# EAGLE board lupa-breakout (EAGLE 8.3.1)
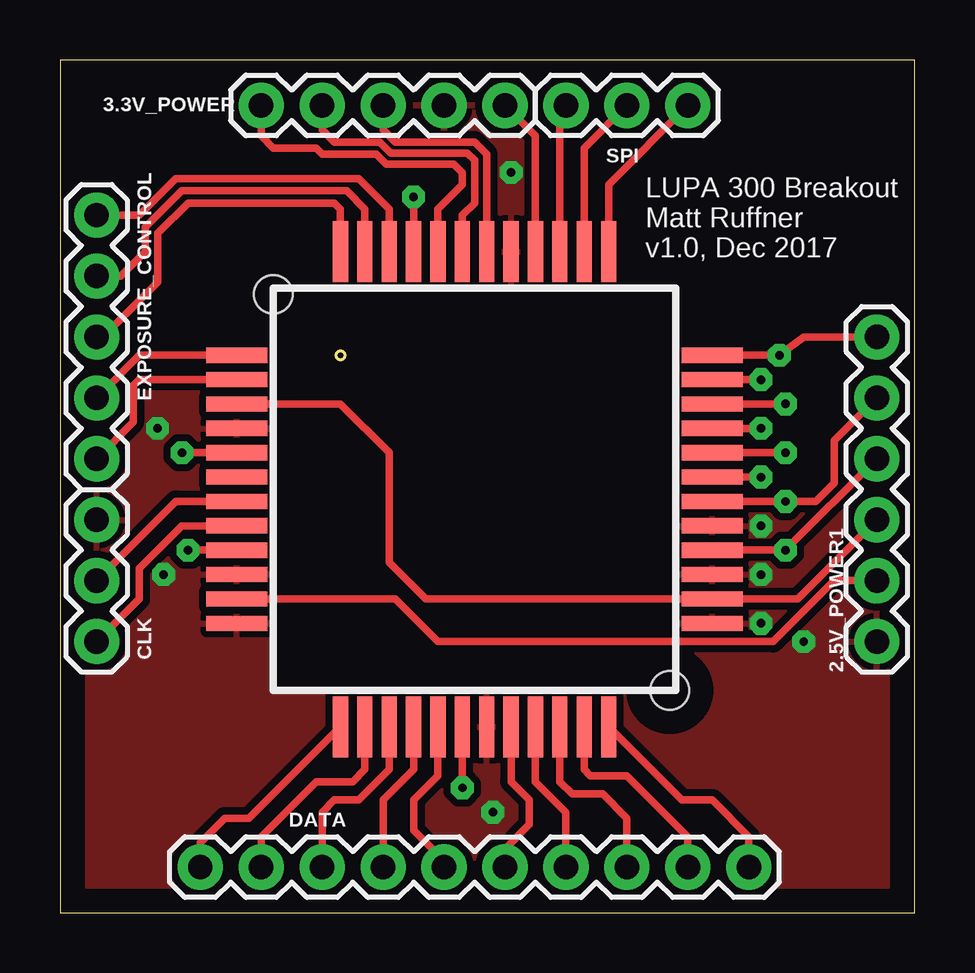
[diagram p0: board, top side]
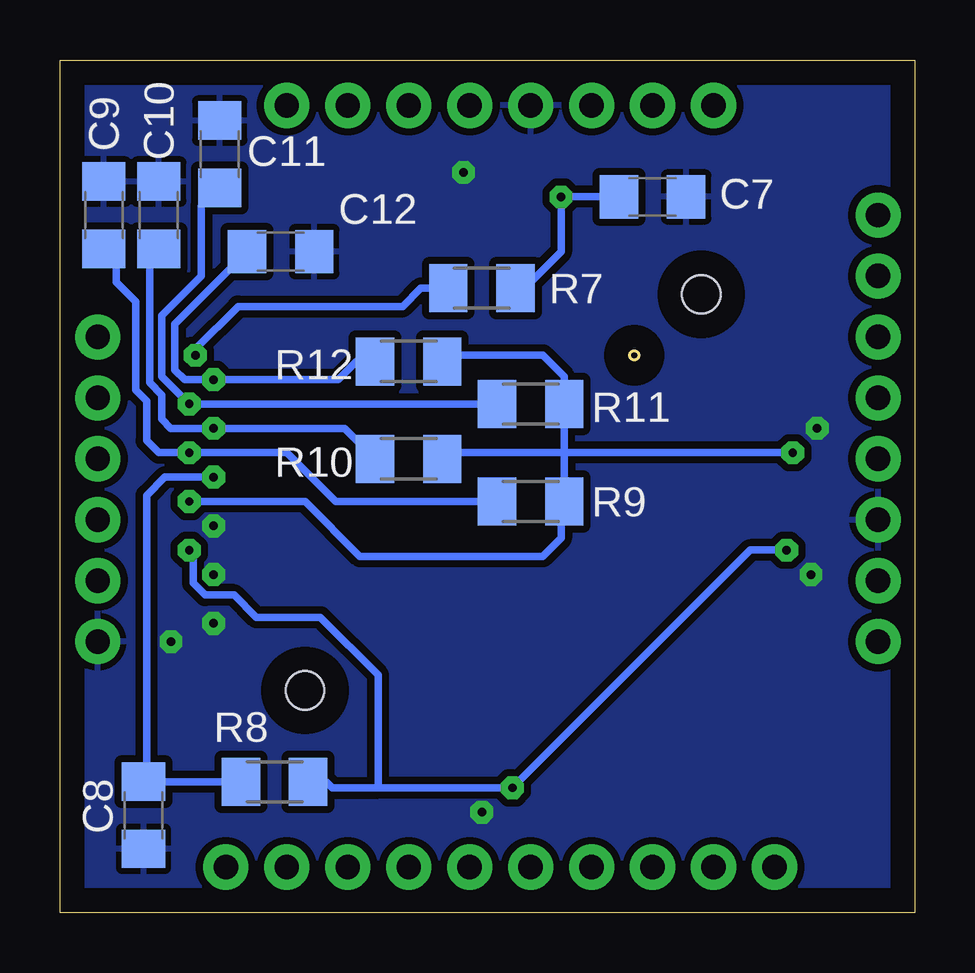
[diagram p1: board, bottom side, seen from below]

Size 35.61 x 35.55 mm. Coordinates in mm from the lower left corner, seen from the top.
Outline: 0,0 35.61,0 35.61,35.55 0,35.55 0,0
Copper layers (1*16): Top 0.035mm / dielectric 1.5mm / Bottom 0.035mm
Design rules "default": minimum track width 6mil, minimum drill 0.35mm, track to track 6mil, track to pad 6mil, pad to pad 6mil, via to via 6mil, smd to smd 6mil, copper to edge 40mil, drill to drill 6mil, minimum pad ring 10mil, minimum via ring 8mil, stop-mask expansion 4mil, vias tented up to drill 0mil, thermal gap 10mil

## Footprints (pad centres in the part's own frame; a part is rotated, then mirrored left to right if it is on the bottom)
1X06 = drill 1.016 pad 1.88: 1 0,0; 2 2.54,0; 3 5.08,0; 4 7.62,0; 5 10.16,0; 6 12.7,0
1X05 = drill 1.016 pad 1.88: 1 0,0; 2 2.54,0; 3 5.08,0; 4 7.62,0; 5 10.16,0
C1206 = smd 1.6 x 1.8: 1 -1.4,0; 2 1.4,0
1X03 = drill 1.016 pad 1.88: 1 0,0; 2 2.54,0; 3 5.08,0
1X10 = drill 1.016 pad 1.88: 1 0,0; 2 2.54,0; 3 5.08,0; 4 7.62,0; 5 10.16,0; 6 12.7,0; 7 15.24,0; 8 17.78,0; 9 20.32,0; 10 22.86,0
M1206 = smd 1.6 x 2: 1 -1.4,0; 2 1.4,0
LUPA300 = smd 2.54 x 0.635: P$1 -2.794,1.524; P$2 -2.794,2.54; P$3 -2.794,3.556; P$4 -2.794,4.572; P$5 -2.794,5.588; P$6 -2.794,6.604; P$7 -2.794,7.62; P$8 -2.794,8.636; P$9 -2.794,9.652; P$10 -2.794,10.668; P$11 -2.794,11.684; P$12 -2.794,12.7; P$13 17.018,12.7; P$14 17.018,11.684; P$15 17.018,10.668; P$16 17.018,9.652; P$17 17.018,8.636; P$18 17.018,7.62; P$19 17.018,6.604; P$20 17.018,5.588; P$21 17.018,4.572; P$22 17.018,3.556; P$23 17.018,2.54; P$24 17.018,1.524 | smd 0.635 x 2.54: P$25 1.524,-2.794; P$26 2.54,-2.794; P$27 3.556,-2.794; P$28 4.572,-2.794; P$29 5.588,-2.794; P$30 6.604,-2.794; P$31 7.62,-2.794; P$32 8.636,-2.794; P$33 9.652,-2.794; P$34 10.668,-2.794; P$35 11.684,-2.794; P$36 12.7,-2.794; P$37 1.524,17.018; P$38 2.54,17.018; P$39 3.556,17.018; P$40 4.572,17.018; P$41 5.588,17.018; P$42 6.604,17.018; P$43 7.62,17.018; P$44 8.636,17.018; P$45 9.652,17.018; P$46 10.668,17.018; P$47 11.684,17.018; P$48 12.7,17.018 | hole 1.6: -1.27,15.24; 15.24,-1.27

## Placement (x,y rotation side)
2.5V_POWER1  [1X06]  34.04,11.3 90 top
3.3V_POWER  [1X05]  8.38,33.66 0 top
C7  0.1uF  [C1206]  10.92,29.84 0 bottom
C8  0.1uF  [C1206]  32.13,4.06 270 bottom
C9  .1uF  [C1206]  33.78,29.08 90 bottom
C10  0.1uF  [C1206]  31.5,29.08 90 bottom
C11  0.1uF  [C1206]  28.96,31.62 90 bottom
C12  0.1uF  [C1206]  26.42,27.56 0 bottom
CLK  455-1750-1-ND  [1X03]  1.52,11.3 90 top
DATA  [1X10]  28.7,1.91 180 top
EXPOSURE_CONTROL  [1X05]  1.52,18.92 90 top
R7  68k  [M1206]  18.03,26.04 0 bottom
R8  10k  [M1206]  26.67,5.46 180 bottom
R9  110k  [M1206]  16,17.14 180 bottom
R10  42k  [M1206]  21.08,18.92 180 bottom
R11  1.5M  [M1206]  16,21.21 180 bottom
R12  500k  [M1206]  21.08,22.99 180 bottom
SPI  455-1750-1-ND  [1X03]  26.16,33.66 180 top
U$1  [LUPA300]  10.16,10.54 0 top

## Library data of the parts
2.5V_POWER1 = SparkFun-Connectors; PROD_ID: CONN-08437
3.3V_POWER EXPOSURE_CONTROL = SparkFun-Connectors
C7-C12 = rcl
CLK SPI = SparkFun-Connectors; PROD_ID: XXX-00000
DATA = SparkFun-Connectors; PROD_ID: CONN-11563
R7-R12 = resistor
U$1 = andon

## Nets
ADC_BIAS: C8.1 R8.2 U$1.P$18
BIAS1: C12.1 R12.2 U$1.P$14
BIAS2: C11.1 R11.2 U$1.P$15
BIAS3: C10.1 R10.2 U$1.P$16
BIAS4: C9.1 R9.2 U$1.P$17
CLK: CLK.1 U$1.P$5
D0: DATA.10 U$1.P$25
D1: DATA.9 U$1.P$26
D2: DATA.8 U$1.P$27
D3: DATA.7 U$1.P$28
D4: DATA.6 U$1.P$29
D5: DATA.5 U$1.P$32
D6: DATA.4 U$1.P$33
D7: DATA.3 U$1.P$34
D8: DATA.2 U$1.P$35
D9: DATA.1 U$1.P$36
FRAME_VALID: EXPOSURE_CONTROL.4 U$1.P$38
GND: 2.5V_POWER1.1 3.3V_POWER.4 C7.2 C8.2 C9.2 C10.2 C11.2 C12.2 CLK.3 U$1.P$1 U$1.P$3 U$1.P$9 U$1.P$20 U$1.P$22 U$1.P$24 U$1.P$31 U$1.P$44
INT_TIME1: EXPOSURE_CONTROL.1 U$1.P$11
INT_TIME2: EXPOSURE_CONTROL.2 U$1.P$12
INT_TIME3: EXPOSURE_CONTROL.3 U$1.P$37
LINE_VALID: EXPOSURE_CONTROL.5 U$1.P$39
PRECHARGE_BIAS: C7.1 R7.2 U$1.P$40
RESET: CLK.2 U$1.P$6
SPI_CLK: SPI.2 U$1.P$47
SPI_DATA: SPI.3 U$1.P$46
SPI_EN: SPI.1 U$1.P$48
VADC: 2.5V_POWER1.4 R8.1 U$1.P$4 U$1.P$21 U$1.P$30
VDDA: 2.5V_POWER1.5 R9.1 R10.1 R11.1 R12.1 U$1.P$8 U$1.P$19
VDDD: 2.5V_POWER1.3 U$1.P$10 U$1.P$23
VDDO: 2.5V_POWER1.2 U$1.P$2
VMEM_H: 3.3V_POWER.5 U$1.P$45
VPIX: 2.5V_POWER1.6 R7.1 U$1.P$13
VRESET_1: 3.3V_POWER.3 U$1.P$43
VRESET_2: 3.3V_POWER.2 U$1.P$42
VRESET_3: 3.3V_POWER.1 U$1.P$41

## Tracks (layer width: path | path; a pad name or v marks a point on that pad's centre or on a via)
ADC_BIAS  (via drill 0.35 pad 0.95)
  Top 0.305: U$1.P$18 v29.21,18.16
  Bottom 0.305: v29.21,18.16 31.24,18.16 32,17.4 32,5.59 C8.1 R8.2
BIAS1  (via drill 0.35 pad 0.95)
  Top 0.305: U$1.P$14 v29.21,22.22
  Bottom 0.305: R12.2 23.27,22.99 24.03,22.22 v29.21,22.22 30.42,22.22 30.83,22.63 30.83,24.54 C12.1
BIAS2  (via drill 0.35 pad 0.95)
  Top 0.305: U$1.P$15 v30.23,21.21
  Bottom 0.305: R11.2 v30.23,21.21 31.37,22.35 31.37,24.89 29.72,26.54 29.72,29.46 C11.1
BIAS3  (via drill 0.35 pad 0.95)
  Top 0.305: U$1.P$16 v29.21,20.19
  Bottom 0.305: R10.2 23.75,20.19 v29.21,20.19 30.99,20.19 31.37,20.57 31.37,21.59 31.88,22.1 31.88,27.18 C10.1 32,27.44
BIAS4  (via drill 0.35 pad 0.95)
  Top 0.305: U$1.P$17 v30.23,19.18
  Bottom 0.305: R9.2 24.13,17.14 26.16,19.18 v30.23,19.18 31.5,19.18 32,19.68 32,21.32 32.46,21.78 32.46,25.48 33.27,26.29 33.27,27.18 C9.1
CLK
  Top 0.305: CLK.1 3.3,13.08 3.3,14.35 5.08,16.13 U$1.P$5
D0
  Top 0.305: U$1.P$25 7.87,3.94 6.86,3.94 5.84,2.92 DATA.10
D1
  Top 0.305: U$1.P$26 12.7,5.97 12.19,5.46 10.67,5.46 8.38,3.17 DATA.9
D2
  Top 0.305: U$1.P$27 13.72,5.97 12.45,4.7 11.43,4.7 10.92,4.19 DATA.8
D3
  Top 0.305: U$1.P$28 14.73,5.97 13.46,4.7 DATA.7
D4
  Top 0.305: U$1.P$29 15.75,5.71 14.73,4.7 14.73,3.43 16,2.16 DATA.6
D5
  Top 0.305: U$1.P$32 18.8,5.46 19.56,4.7 19.56,3.68 18.54,2.67 DATA.5
D6
  Top 0.305: DATA.4 21.08,4.19 19.81,5.46 U$1.P$33
D7
  Top 0.305: U$1.P$34 20.83,5.46 21.34,4.95 22.61,4.95 23.62,3.94 DATA.3
D8
  Top 0.305: U$1.P$35 21.84,5.97 22.1,5.71 23.62,5.71 26.16,3.17 DATA.2
D9
  Top 0.305: U$1.P$36 25.91,4.7 27.18,4.7 28.7,3.17 DATA.1
FRAME_VALID
  Top 0.305: U$1.P$38 12.7,29.34 11.94,30.1 5.08,30.1 3.56,28.57 3.56,27.56 2.54,26.54 EXPOSURE_CONTROL.4
GND  (via drill 0.35 pad 0.95)
  other vias: 18.8,30.86 18.03,4.19 4.06,20.19 4.32,14.1 29.21,12.07 29.21,16.13 29.21,14.1 30.99,11.3
  pour Top (isolate 0.305): 0,35.56 35.56,35.56 35.56,0 0,0
  pour Bottom (isolate 0.305): 0,35.56 35.56,35.56 35.56,0 0,0
INT_TIME1
  Top 0.305: U$1.P$11 3.3,22.22 3.05,21.97 3.05,20.45 EXPOSURE_CONTROL.1
INT_TIME2
  Top 0.305: EXPOSURE_CONTROL.2 3.3,23.24 U$1.P$12
INT_TIME3
  Top 0.305: U$1.P$37 11.68,29.34 11.43,29.59 5.33,29.59 4.06,28.32 4.06,26.29 1.78,24 EXPOSURE_CONTROL.3
LINE_VALID
  Top 0.305: U$1.P$39 13.72,29.34 12.45,30.61 4.83,30.61 3.3,29.08 EXPOSURE_CONTROL.5
N$1
  cutout Top: 8.89,26.04 25.4,26.04 25.65,25.78 25.65,9.52 25.4,9.27 9.14,9.27 8.89,9.52
PRECHARGE_BIAS  (via drill 0.35 pad 0.95)
  Top 0.305: v14.73,29.84 U$1.P$40
  Bottom 0.305: C7.1 v14.73,29.84 U$1.P$40 16.26,26.04 R7.2
RESET
  Top 0.305: CLK.2 4.83,17.14 U$1.P$6
SPI_CLK
  Top 0.305: SPI.2 21.84,31.88 U$1.P$47
SPI_DATA
  Top 0.305: SPI.3 20.83,33.4 U$1.P$46
SPI_EN
  Top 0.305: SPI.1 22.86,30.35 U$1.P$48
VADC  (via drill 0.35 pad 0.95)
  Top 0.305: U$1.P$4 v5.33,15.11 | v16.76,5.21 U$1.P$30 | U$1.P$21 v30.23,15.11 2.5V_POWER1.4
  Bottom 0.305: 22.35,5.21 24.26,5.21 24.51,5.46 R8.1 | 22.35,5.21 v16.76,5.21 6.86,15.11 v5.33,15.11 | 22.35,5.21 22.35,9.91 24.77,12.32 27.43,12.32 28.36,13.24 29.56,13.24 30.07,13.74 30.07,14.95 v30.23,15.11
VDDA  (via drill 0.35 pad 0.95)
  Top 0.305: U$1.P$19 v30.23,17.14 31.5,17.14 32.26,17.91 32.26,19.68 2.5V_POWER1.5 | v5.08,19.18 U$1.P$8
  Bottom 0.305: v5.08,19.18 14.6,19.18 | R12.1 19.43,23.24 15.49,23.24 14.6,22.35 R11.1 14.6,19.18 | 14.6,19.18 R9.1 14.73,17.02 14.73,15.62 15.49,14.86 23.11,14.86 25.4,17.14 v30.23,17.14 | R10.1 19.43,19.18 14.6,19.18
VDDD
  Top 0.305: 2.5V_POWER1.3 30.73,13.08 U$1.P$23 15.24,13.08 13.72,14.61 13.72,19.18 11.68,21.21 U$1.P$10
VDDO
  Top 0.305: 2.5V_POWER1.2 32.26,13.84 29.72,11.3 15.75,11.3 13.97,13.08 U$1.P$2
VMEM_H
  Top 0.305: 3.3V_POWER.5 19.81,32.38 U$1.P$45
VPIX  (via drill 0.35 pad 0.95)
  Top 0.305: U$1.P$13 v29.97,23.24 30.99,24 2.5V_POWER1.6
  Bottom 0.305: v29.97,23.24 29.97,23.49 28.19,25.27 21.34,25.27 20.57,26.04 R7.1
VRESET_1
  Top 0.305: U$1.P$43 17.78,31.62 17.27,32.13 13.97,32.13 13.46,32.64 3.3V_POWER.3
VRESET_2
  Top 0.305: U$1.P$42 16.76,29.08 17.27,29.59 17.27,31.37 16.97,31.67 13.78,31.67 13.32,32.13 11.43,32.13 10.92,32.64 3.3V_POWER.2
VRESET_3
  Top 0.305: U$1.P$41 15.75,29.34 16.76,30.35 16.76,30.86 16.41,31.22 13.59,31.22 13.18,31.62 10.92,31.62 10.67,31.88 8.89,31.88 8.38,32.38 3.3V_POWER.1

## Text on the board
tNames: LUPA 300 Breakout / Matt Ruffner / v1.0, Dec 2017